# EAGLE board 16-pin-rocketnet-daughter (EAGLE 6.3)
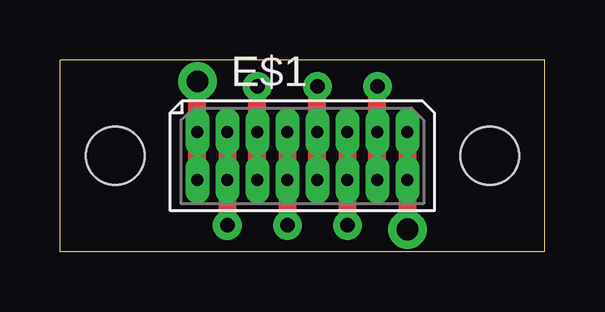
[diagram p0: board, top side]
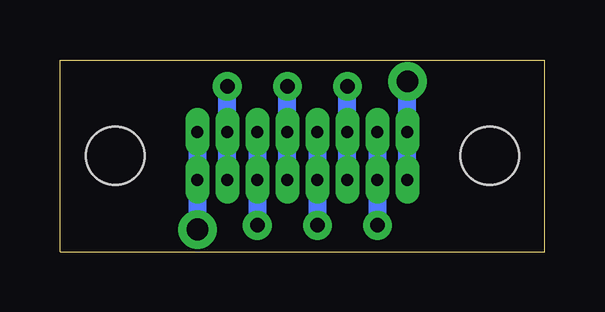
[diagram p1: board, bottom side, seen from below]

Size 20.2 x 8 mm. Coordinates in mm from the lower left corner, seen from the top.
Outline: 20.2,0 20.2,8 0,8 0,0 20.2,0
Copper layers (1*16): Top 0.035mm / dielectric 1.5mm / Bottom 0.035mm
Design rules "lpkf-s63-epl": minimum track width 10mil, minimum drill 0.35mm, track to track 8mil, track to pad 8mil, pad to pad 8mil, via to via 8mil, smd to smd 8mil, copper to edge 10mil, drill to drill 8mil, minimum pad ring 10mil, minimum via ring 8mil, stop-mask expansion 4mil, vias tented up to drill 0mil, thermal gap 10mil
Holes 2.44 mm at 17.9,4 2.3,4

## Footprints (pad centres in the part's own frame; a part is rotated, then mirrored left to right if it is on the bottom)
ROCKETBUS_ROCKETBUS-RECEPTACLE = drill 0.5 pad 0.9 long: AUX1@11 1.875,1; AUX1@12 1.875,-1; AUX2@13 3.125,1; AUX2@14 3.125,-1; B+@1 -4.375,1; B+@2 -4.375,-1; B-@15 4.375,1; B-@16 4.375,-1; RX+@7 -0.625,1; RX+@8 -0.625,-1; RX-@9 0.625,1; RX-@10 0.625,-1; TX+@3 -3.125,1; TX+@4 -3.125,-1; TX-@5 -1.875,1; TX-@6 -1.875,-1

## Placement (x,y rotation side)
E$1  [ROCKETBUS_ROCKETBUS-RECEPTACLE]  10.1,4 0 top

## Library data of the parts
E$1 = 16-pin-rocketnet-daughter

## Nets
AUX1: E$1.AUX1@11
AUX2: E$1.AUX2@14
B+: E$1.B+@1 E$1.B+@2
B-: E$1.B-@15
RX+: E$1.RX+@7
RX-: E$1.RX-@10
TX+: E$1.TX+@3
TX-: E$1.TX-@6

## Tracks (layer width: path | path; a pad name or v marks a point on that pad's centre or on a via)
AUX1  (via drill 0.6 pad 1.2)
  Top 0.75: E$1.AUX1@11 v11.97,1.1
  Bottom 0.75: E$1.AUX1@11 v11.97,1.1
AUX2  (via drill 0.6 pad 1.2)
  Top 0.75: E$1.AUX2@14 v13.22,6.9
  Bottom 0.75: E$1.AUX2@14 v13.22,6.9
B+  (via drill 0.9 pad 1.6)
  Top 0.75: 5.72,2.98 v5.72,7.1
  Bottom 0.75: E$1.B+@2 E$1.B+@1 v5.72,7.1
B-  (via drill 0.9 pad 1.6)
  Top 0.75: E$1.B-@15 v14.47,0.93
  Bottom 0.75: E$1.B-@15 v14.47,0.93
RX+  (via drill 0.6 pad 1.2)
  Top 0.75: E$1.RX+@7 v9.47,1.1
  Bottom 0.75: E$1.RX+@7 v9.47,1.1
RX-  (via drill 0.6 pad 1.2)
  Top 0.75: E$1.RX-@10 v10.72,6.9
  Bottom 0.75: E$1.RX-@10 v10.72,6.9
S$3  (via drill 0.6 pad 1.2)
  other vias: 8.22,6.9
TX+  (via drill 0.6 pad 1.2)
  Top 0.75: E$1.TX+@3 v6.97,1.1
  Bottom 0.75: E$1.TX+@3 v6.97,1.1
TX-
  Top 0.75: E$1.TX-@6 8.22,6.92
  Bottom 0.75: E$1.TX-@6 8.22,6.9

## Text on the board
Document: TOP VIEW (JST CONNECTOR FACING UP) | B+ | TX- | RX- | AUX2 | TX+ | RX+ | AUX1 | B-